# Altium PCB PCB2.PcbDoc (part 1 of 2)
Units mil, origin at the board's own origin, x right, y up, seen from the top; angles counter-clockwise.
Board outline 6550 x 5130 mil, 2 copper layers (Top Layer, Bottom Layer); 91 components, 70 nets, 283 pads, 64 vias.
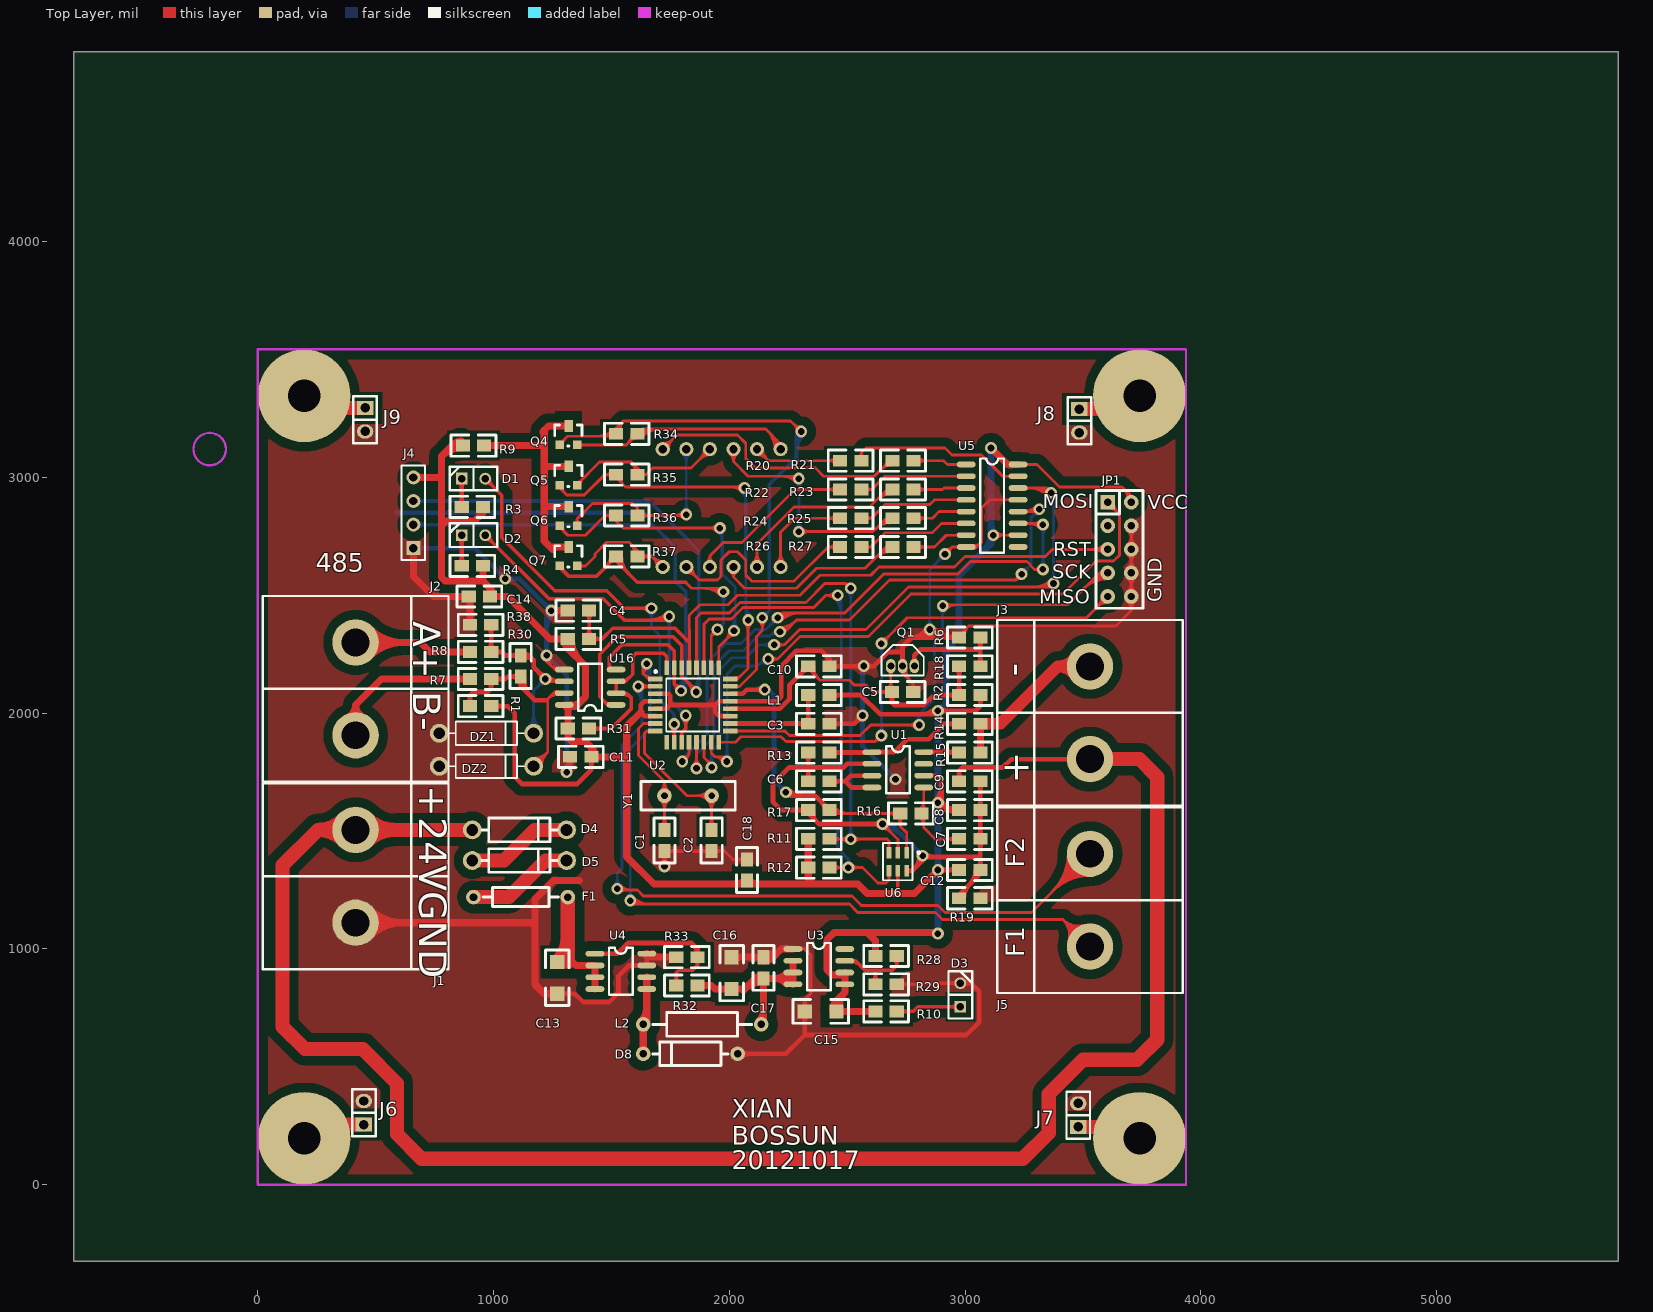
[diagram p0: Top Layer view]
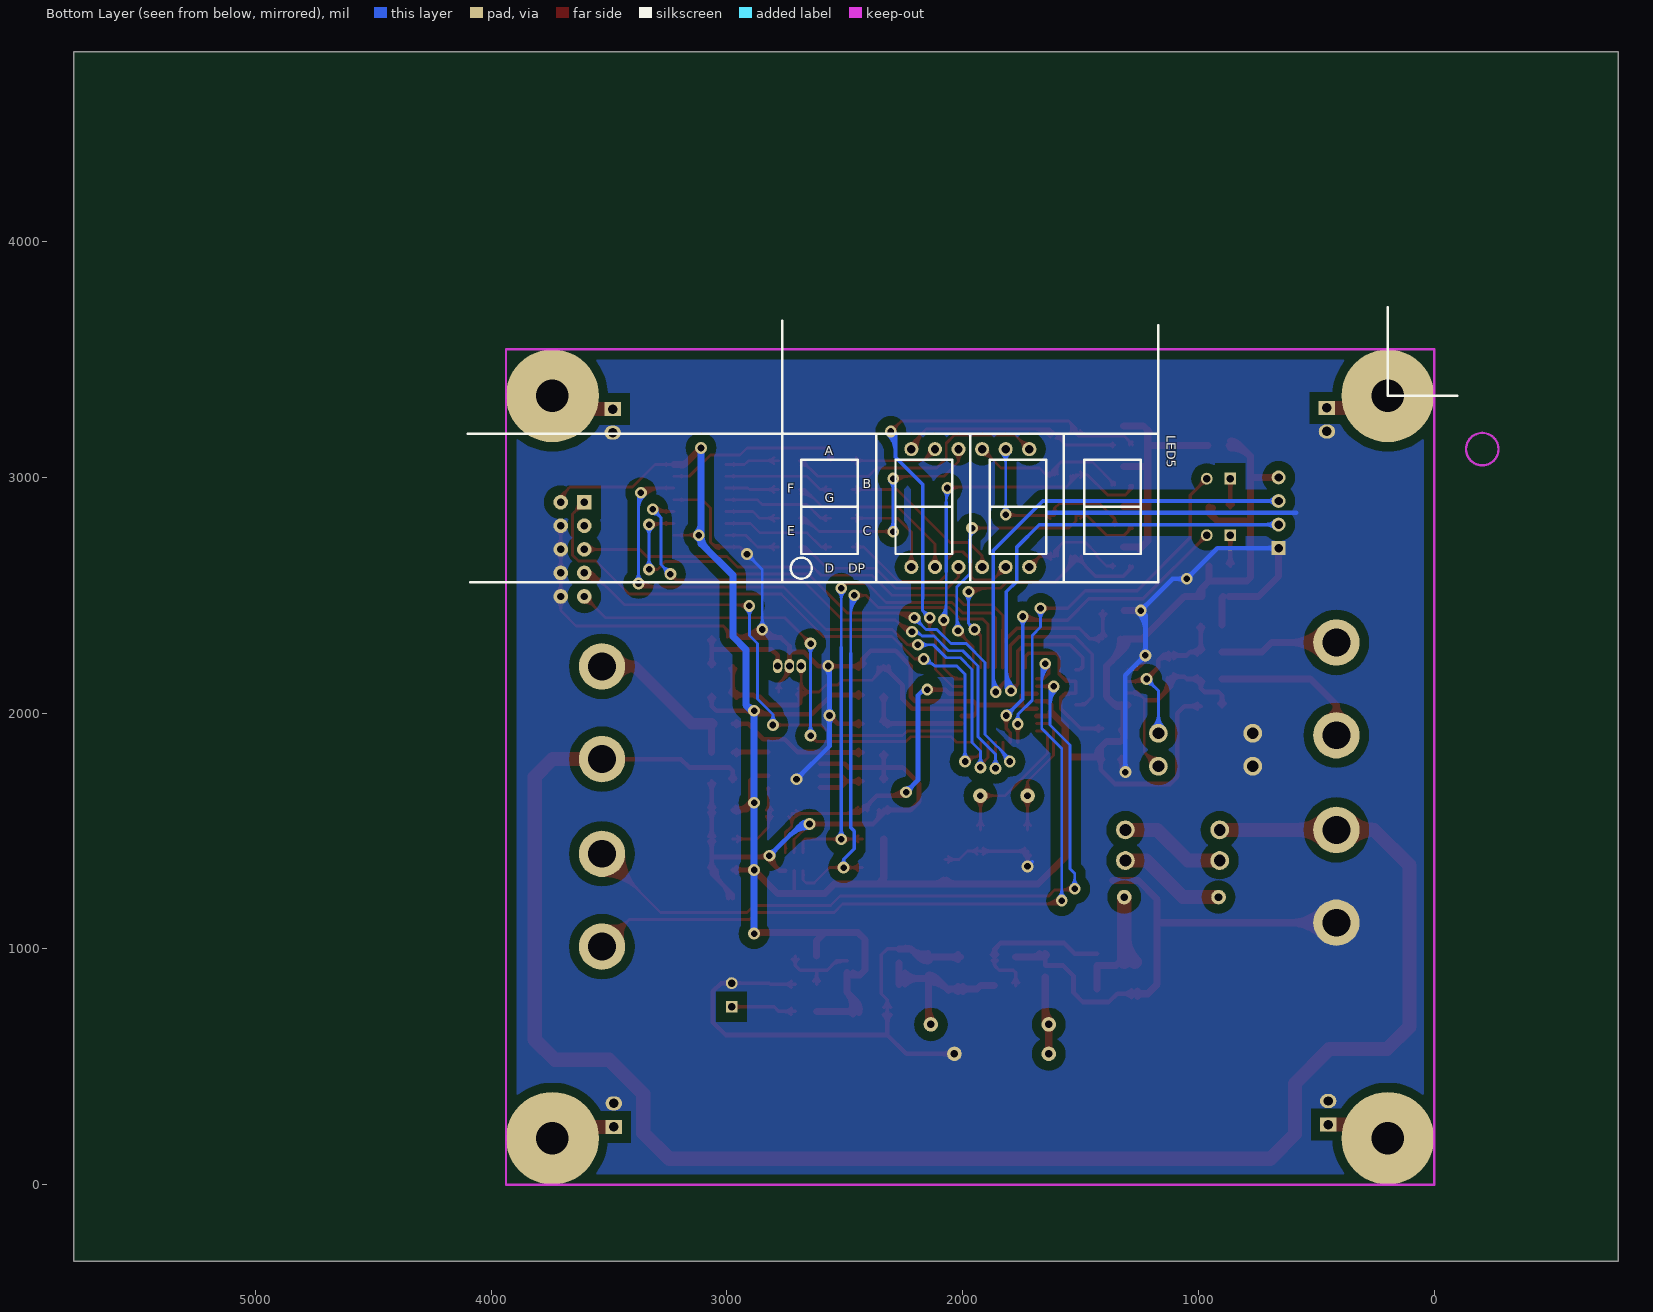
[diagram p1: Bottom Layer view, seen from below]

## Layer stack, top to bottom
Top Layer: signal copper 1.4
Dielectric: dielectric 12.6, FR-4, Dk 4.8
Bottom Layer: signal copper 1.4

## Board outline
-780,4190 -780,-325 5770,-325 5770,4805 -780,4805

## Design rules (kind name [scope] priority, off if disabled: settings)
Clearance poly [(InPolygon)] p1: gap=39.37
Clearance Clearance_2 [All] p2: gap=10
ComponentClearance [All] p1: gap=10 collisioncheckmode=0
HoleSize [All] p1: absolutevalues=TRUE maxlimit=1000 minlimit=1 maxpercent=80.000 minpercent=20.000
PolygonConnect [All] p1: connectstyle=Direct reliefconductorwidth=10 reliefentries=4 polygonreliefangle="90 Angle"
RoutingVias [All] p1: holewidth=28 width=50 viastyle="Through Hole" minholewidth=28 minwidth=50 maxholewidth=28 maxwidth=50
SolderMaskExpansion [All] p1: expansion=4
TestPointUsage [All] p1: valid=0 allowmultiple=FALSE
Testpoint [All] p1: side=15 testpointundercomponent=TRUE minsize=40 maxsize=100 preferedsize=60 minholesize=0 maxholesize=40 preferedholesize=32 testpointgrid=1 style=1023 order=1234567890
Width [All] p1: maxlimit=1000 minlimit=12 preferedwidth=15 toplayer_prefwidth=30 bottomlayer_prefwidth=12 minimp=50.000000 maximp=50.000000 favimp=50.000000
16 further rules are at their usual default settings.

## Components (designator, comment, footprint, x,y, rotation, side; value= is the part's Value field where it differs from the comment)
C1 "15pF" 0805 1725,1415 r90 top
C2 "15pF" 0805 1925,1415 r90 top
C3 "104" 0805 2335,1955 r0 top
C4 "104" 0805 1405,2435 r180 top
C5 "104" 0805 2690,2090 r0 top
C6 "103" 0805 2425,1711 r180 top
C7 "104" 0805 2975,1467 r0 top
C8 "104" 0805 3065,1589 r180 top
C9 "104" 0805 2975,1711 r0 top
C10 "104" 0805 2335,2199 r0 top
C11 "103" 0805 1325,1815 r0 top
C12 "103" 0805 3065,1335 r180 top
C13 "50V/4.7uF" 1206 1270,945 r270 top
C14 "104" 0805 895,2495 r0 top
C15 "16V/4.7uF" 1206 2455,735 r180 top
C16 "16V/4.7uF" 1206 2010,830 r90 top
C17 "104" 0805 2145,965 r270 top
C18 "104" 0805 2075,1380 r270 top
D1 "LED" SIP2 865,2995 r0 top
D2 "LED" SIP2 865,2755 r0 top
D3 "LED" SIP2 2980,755 r90 top
D4 "1N4007" DIODE0.4#1 910,1505 r0 top
D5 "1N4007" DIODE0.4#1 910,1375 r0 top
D8 "5822" DIODE0.4#2 2035,555 r180 top
DZ1 "P6KE10A" DIODE-0.4 970,1915 r0 top
DZ2 "P6KE10A" DIODE-0.4 970,1775 r0 top
F1 "1A" AXIAL0.4 1315,1220 r180 top
J1 "Power" duanzi 415,1505 r270 top
J2 "485" duanzi 415,2300 r270 top
J3 "4-20mA" duanzi 3530,1805 r90 top
J4 "Uart" HDR1X4 660,2700 r90 top
J5 "Power" duanzi 3530,1010 r90 top
J6 "Power" sip2 450,255 r90 top
J7 "Power" sip2 3480,245 r90 top
J8 "Power" sip2 3485,3290 r270 top
J9 "Power" sip2 455,3295 r270 top
JP1 "HEADER 5X2" IDC10 3605,2895 r270 top
L1 "10uH" 0805 2335,2077 r0 top
L2 "22uH" AXIAL0.5 1635,680 r0 top
LED5 "SR*410402" SR410402 2765,2555 r180 bottom
Q1 "431" to-92b 2785,2200 r180 top
Q4 "SI2301" SOT-23 1280,3138 r0 top
Q5 "SI2301" SOT-23 1280,2967 r0 top
Q6 "SI2301" SOT-23 1280,2796 r0 top
Q7 "SI2301" SOT-23 1280,2625 r0 top
R1 "10K" 0805 900,2030 r0 top
R2 "10K" 0805 2975,2077 r0 top
R3 "1K" 0805 865,2875 r0 top
R4 "1K" 0805 865,2625 r0 top
R5 "10K" 0805 1405,2315 r180 top
R6 "1K" 0805 2975,2321 r0 top
R7 "100" 0805 900,2145 r0 top
R8 "100" 0805 900,2260 r0 top
R9 "0" 0805 870,3135 r0 top
R10 "1K" 0805 2710,735 r180 top
R11 "10K" 0805 2425,1467 r180 top
R12 "10K" 0805 2425,1345 r180 top
R13 "51%0.1" 0805 2335,1833 r0 top
R14 "5.1%0.1" 0805 2975,1955 r0 top
R15 "10" 0805 2975,1833 r0 top
R16 "5.1K%0.1" 0805 2725,1575 r0 top
R17 "5.1K%0.1" 0805 2335,1589 r0 top
R18 "0" 0805 2975,2199 r0 top
R19 "0" 0805 3065,1215 r180 top
R20 "200" 0805 2560,3071 r180 top
R21 "200" 0805 2782,3071 r180 top
R22 "200" 0805 2560,2949 r180 top
R23 "200" 0805 2782,2949 r180 top
R24 "200" 0805 2560,2827 r180 top
R25 "200" 0805 2782,2827 r180 top
R26 "200" 0805 2560,2705 r180 top
R27 "200" 0805 2782,2705 r180 top
R28 "36K" 0805 2710,970 r180 top
R29 "27K" 0805 2620,850 r0 top
R30 "4.7K" 0805 1115,2155 r90 top
R31 "10K" 0805 1405,1935 r180 top
R32 "5.1K" 0805 1775,845 r0 top
R33 "1K" 0805 1775,965 r0 top
R34 "0" 0805 1520,3185 r0 top
R35 "0" 0805 1520,3011.67 r0 top
R36 "0" 0805 1520,2838.33 r0 top
R37 "0" 0805 1520,2665 r0 top
R38 "10K" 0805 900,2375 r0 top
U1 "AD8200-YR" so-8 2605,1835 r0 top
U2 "ATmega8-16AC" 32A 1845,2035 r0 top
U3 "NCP3334" SO-8 2270,1000 r0 top
U4 "DB1513" SO-8 1430,980 r0 top
U5 "MC74HC595D" SO-16 3005,3055 r0 top
U6 "ADS1110A0" SO-G6/X.5 2714.57,1370.08 r180 top
U16 "MAX485ESA" SO-8 1520,2035 r180 top
Y1 "8M" XTAL1 1925,1650 r180 top

## Footprints (in the part's own frame and the unit in brackets; to place one, negate y for a bottom-side part, rotate by r counter-clockwise, add the part's x,y. Pads: shape width x height; smd on the part's side, far side on the other; paste and mask are expansions set on the pad)
32A [mm] "QFP; 32 Leads; Body 7 x 7 mm; Pitch 0.8 mm"
  rect 1.55x0.5 smd: 1(-4.025,2.8) 2(-4.025,2) 3(-4.025,1.2) 4(-4.025,0.4) 5(-4.025,-0.4) 6(-4.025,-1.2) 7(-4.025,-2) 8(-4.025,-2.8) 17(4.025,-2.8) 18(4.025,-2) 19(4.025,-1.2) 20(4.025,-0.4) 21(4.025,0.4) 22(4.025,1.2) 23(4.025,2) 24(4.025,2.8)
  rect 0.5x1.55 smd: 9(-2.8,-4.025) 10(-2,-4.025) 11(-1.2,-4.025) 12(-0.4,-4.025) 13(0.4,-4.025) 14(1.2,-4.025) 15(2,-4.025) 16(2.8,-4.025) 25(2.8,4.025) 26(2,4.025) 27(1.2,4.025) 28(0.4,4.025) 29(-0.4,4.025) 30(-1.2,4.025) 31(-2,4.025) 32(-2.8,4.025)
  silkscreen extent -4.12,-2.85 2.85,3.72
0805 [mil]
  rect 60x50 smd: 1(0,0) 2(90,0)
  silkscreen extent -50,-45 140,45
1206 [mil]
  rect 60x60 smd: 1(0,0) 2(135,0)
  silkscreen extent -50,-50 185,50
AXIAL0.4 [mil]
  round 62 hole 32: 1(0,0) 2(400,0)
  silkscreen extent 40,-40 360,40
AXIAL0.5 [mil]
  round 62 hole 32: 1(0,0) 2(500,0)
  silkscreen extent 40,-50 460,50
DIODE0.4#1 [mil]
  round 80 hole 50: 1(0,0) 2(400,0)
  silkscreen extent 40,-50 360,50
DIODE0.4#2 [mil]
  round 62 hole 32: 1(0,0) 2(400,0)
  silkscreen extent 40,-50 360,50
DIODE-0.4 [mil]
  round 80 hole 50: 1(-200,0) 2(200,0)
  silkscreen extent -160,-50 160,50
duanzi [mm]
  round 5 hole 3: 1(0,0) 2(10,0)
  silkscreen extent -5,-10 15,10
HDR1X4 [mm] "Connector; Header; 4 Position"
  rect 1.5x1.5 hole 0.9: 1(0,0)
  round 1.5 hole 0.9: 2(2.54,0) 3(5.08,0) 4(7.62,0)
  silkscreen extent -1.27,-1.27 8.89,1.27
IDC10 [mil]
  rect 62x62 hole 31.5: 1(0,0)
  round 62 hole 31.5: 2(0,100) 3(100,0) 4(100,100) 5(200,0) 6(200,100) 7(300,0) 8(300,100) 9(400,0) 10(400,100)
  silkscreen extent -50,-50 450,150
SIP2 [mil]
  rect 50x50 hole 32: 1(0,0)
  round 50 hole 32: 2(100,0)
  silkscreen extent -50,-50 150,50
sip2 [mil]
  rect 60x70 hole 40: 1(0,0)
  oval 60x70 hole 40: 2(100,0)
  silkscreen extent -50,-50 150,50
so-8 [mil]
  oval 80x24 smd: 1(0,0) 2(0,-50) 3(0,-100) 4(0,-150) 5(220,-150) 6(220,-100) 7(220,-50) 8(220,0)
  silkscreen extent 60,-175 160,25
SO-8 [mil]
  oval 80x24 smd: 1(0,0) 2(0,-50) 3(0,-100) 4(0,-150) 5(220,-150) 6(220,-100) 7(220,-50) 8(220,0)
  silkscreen extent 60,-175 160,25
SO-16 [mil]
  oval 80x24 smd: 1(0,0) 2(0,-50) 3(0,-100) 4(0,-150) 5(0,-200) 6(0,-250) 7(0,-300) 8(0,-350) 9(220,-350) 10(220,-300) 11(220,-250) 12(220,-200) 13(220,-150) 14(220,-100) 15(220,-50) 16(220,0)
  silkscreen extent 60,-375 160,25
SO-G6/X.5 [mm]
  rect 0.5x1.25 smd: 1(-0.95,-0.975) 2(0,-0.975) 3(0.95,-0.975) 4(0.95,0.975) 5(0,0.975) 6(-0.95,0.975)
  silkscreen extent -2.38,-2 1.6,2
SOT-23 [mil]
  rect 36x36 smd: 1(0,0) 2(75,0)
  rect 36x50 smd: 3(38,80)
  silkscreen extent -20,-5 95,85
SR410402 [mm]
  round 1.524 hole 0.9: 1(13.9,1.65) 2(16.44,1.65) 3(18.98,1.65) 4(21.52,1.65) 5(24.06,1.65) 6(26.6,1.65) 7(26.6,14.35) 8(24.06,14.35) 9(21.52,14.35) 10(18.98,14.35) 11(16.44,14.35) 12(13.9,14.35)
  silkscreen extent 0,0 40.5,16
to-92b [mil]
  oval 40x60 hole 30: 1(0,0) 2(50,0) 3(100,0)
  silkscreen extent -40,-90 140,40
XTAL1 [mil]
  round 62 hole 28: 1(0,0) 2(200,0)
  silkscreen extent -100,-60 300,60

## Part data
C1 C2 C3 C4 C5 C6 C7 C8 C9 C10 C12 C17 C18: library part CAP, "Capacitor"
C11 C14: library part Cap, "Capacitor"
C13 C15 C16: library part ELECTRO1, "Electrolytic Capacitor"
D4 D5 D8: library part DIODE, "Diode"
DZ1 DZ2: library part ZENER2, "Zener Diode"
F1: library part "THERMAL FUSE"
J1: library part CON4, "Connector"
J2 J3 J5 J6 J7 J8 J9: library part Buzzer, "Magnetic Transducer Buzzer"
J4: library part "Header 4", "Header, 4-Pin"
L1 R1 R2 R3 R4 R5 R6 R7 R8 R9 R10 R11 R12 R16 R17 R18 R19 R28 R29 R30 R31 R32 R33 R34 R35 R36 R37 R38: library part RES2
L2: library part INDUCTOR1
LED5: library part LED4-8A, "Seven-Segment Display, Right Hand Decimal"
Q1: library part SCR
R13 R14 R15: library part res2
R20 R21 R22 R23 R24 R25 R26 R27: library part R
U1: library part ad8200
U2: "8-Bit AVR Microcontroller with 8K Bytes of In-System Programmable Flash Memory"
U5: library part MC74HC595AN, "8-Bit Serial-Input/Serial or Prallel-Output Shift Register with Latched 3-State Outputs"
U6: library part VOLTREG
U16: library part Pro91A3.TMP_MAX1487E_10
Y1: library part CRYSTAL, "Crystal"

## Free pads (board coordinates)
  round 393.7 hole 137.8: 2(196.85,196.85) 2(196.85,3346.46) 2(3740.16,196.85) 2(3740.16,3346.46)

## Via types
v1: diameter 50, hole 28, Top Layer to Bottom Layer, 64 vias

## Nets (pads, with @x,y where several pads share a name; then routed paths per layer and width w, separated by ;. In a path a pad name is that pad's centre, name@x,y a point inside that pad or via, vN(x,y) a via of type N, cw(c..) or ccw(c..) an arc to the next point about the centre after c; other vN are vias at no path point)
+5: C16.1 C17.2 L2.2 R32.2 U3.2 U3.3 U3.4 | length 1197.5
  Top Layer w30: R32.2@1865,845 1925,845 1940,830 2065,830 2110,875 2270,875 ; C16.1@1999.39,819.39 ccw(c1973.79,793.79) 1973.79,830 ccw(c1973.79,866.21) C16.1@1999.39,840.61 ; C16.1@2020.61,819.39 cw(c2046.21,793.79) 2046.21,830 cw(c2046.21,866.21) C16.1@2020.61,840.61 ; 2059.64,824.64 cw(c2145,739.29) C17.2@2145,860 ; 2092.5,857.5 cw(c2122.64,827.36) C17.2@2140.75,865.95 ; 2110.86,875.86 cw(c2145,841.72) C17.2@2145,890 ; L2.2@2123.69,691.31 ccw(c2072.23,742.77) 2145,742.77 ; L2.2@2135,680 2145,690 C17.2@2145,875 ; U3.4@2244.12,852.12 ccw(c2188.89,796.89) 2188.89,875 ccw(c2188.89,953.11) U3.3@2244.12,897.88 ; U3.4@2270,850 U3.2@2270,940
A3: LED5.11 R20.2 | length 535.6
  Top Layer w12: LED5.11@2117.76,3095.96 cw(c2117.76,3038.02) 2158.73,3078.99 cw(c2199.7,3119.96) LED5.11@2141.76,3119.96 ; LED5.11@2117.76,3119.96 2166.72,3071 R20.2@2470,3071 ; R20.2@2451.56,3057.56 ccw(c2419.13,3025.13) 2419.13,3071 ccw(c2419.13,3116.87) R20.2@2451.56,3084.44
ADC: R16.1 R17.2 U2.22 U6.1 | length 1910.3
  Top Layer w12: R17.2@2425,1589 2439,1575 R16.1@2725,1575 2725,1520 2752.4,1492.6 U6.1@2752.4,1408.39 ; R17.2@2426.46,1585.46 ccw(c2451.73,1610.73) R17.2@2451.73,1575 ; R17.2@2434.95,1593.95 ccw(c2480.7,1639.7) 2480.7,1575 ; R17.2@2443.44,1602.44 ccw(c2509.67,1668.67) 2509.67,1575 ; R16.1@2706.56,1561.56 ccw(c2674.13,1529.13) 2674.13,1575 ccw(c2674.13,1620.87) R16.1@2706.56,1588.44 ; R16.1@2711.56,1561.56 cw(c2679.13,1529.13) 2725,1529.13 cw(c2770.87,1529.13) R16.1@2738.44,1561.56 ; U6.1@2749.25,1425.95 ccw(c2741.65,1433.55) 2752.4,1433.55
  Top Layer w20: U2.22@2003.46,2082.24 2057.24,2082.24 2075,2100 v1(2150,2100) ; v1@2139.39,2089.39 ccw(c2113.79,2063.79) 2113.79,2100 ccw(c2113.79,2136.21) v1@2139.39,2110.61 ; v1@2236.46,1661.46 ccw(c2264.14,1689.14) 2264.14,1650 ; v1(2240,1665) 2245,1665 2260,1650 2364,1650 R17.2@2425,1589 ; v1@2250.61,1675.61 ccw(c2312.43,1737.43) 2312.43,1650 ; 2390.86,1623.14 cw(c2356.72,1589) R17.2@2405,1589 ; R17.2@2402.93,1611.07 ccw(c2420,1628.14) R17.2@2420,1604
  Bottom Layer w20: v1(2150,2100) 2165,2100 2190,2075 2190,1715 v1(2240,1665) ; v1@2225,1665 ccw(c2188.79,1665) 2214.39,1690.61 ccw(c2240,1716.21) v1@2240,1680
AGND: C6.2 C7.2 C8.1 C9.2 C12.1 R13.1 R17.1 R19.2 U1.2 U6.2 U6.6 | length 3754.5
  Top Layer w12: v1@2650,1511 cw(c2650,1465.13) 2682.44,1497.56 cw(c2714.87,1530) v1@2669,1530 ; v1(2650,1530) 2715,1465 U6.2@2715,1408.39 ; U6.2@2711.85,1425.95 ccw(c2704.24,1433.55) 2715,1433.55
  Top Layer w20: R17.1@2319.39,1578.39 ccw(c2293.79,1552.79) 2293.79,1589 ccw(c2293.79,1625.21) R17.1@2319.39,1599.61 ; C6.2@2324.39,1721.61 ccw(c2298.79,1747.21) 2335,1747.21 ccw(c2371.21,1747.21) C6.2@2345.61,1721.61 ; R13.1@2324.39,1822.39 cw(c2298.79,1796.79) 2335,1796.79 cw(c2371.21,1796.79) R13.1@2345.61,1822.39 ; C6.2@2335,1711 2335,1770 ; R13.1@2335,1833 2335,1775 2340,1770 ; R17.1@2354.84,1586.81 ccw(c2409.73,1578.73) 2370.5,1539.5 ; U1.2@2605,1785 2500,1785 2485,1770 2255,1770 2185,1700 2185,1625 2221,1589 R17.1@2335,1589 2335,1575 2380,1530 v1(2650,1530) ; v1@2639.39,1519.39 ccw(c2613.79,1493.79) 2613.79,1530 ccw(c2613.79,1566.21) v1@2639.39,1540.61 ; U6.6@2752.4,1331.61 2776.61,1331.61 2835,1390 3060,1390 3065,1395 ; 2786.62,1341.62 ccw(c2741.25,1386.98) v1@2805.08,1393.48 ; v1@2830.61,1405.61 ccw(c2868.28,1443.28) 2868.28,1390 ; 2985.61,1240.61 ccw(c3011.21,1215) R19.2@2975,1215 2975,1230 3065,1320 C9.2@3065,1711 ; R19.2@2995,1215 cw(c3079.5,1215) 3019.75,1274.75 ; 3020.25,1275.25 ccw(c2960.5,1335) C12.1@3045,1335 ; 3054.39,1309.39 ccw(c3028.79,1335) C12.1@3065,1335 ; C12.1@3054.39,1345.61 ccw(c3028.79,1371.21) 3065,1371.21 ccw(c3101.21,1371.21) C12.1@3075.61,1345.61 ; C7.2@3054.39,1456.39 cw(c3028.79,1430.79) 3065,1430.79 cw(c3101.21,1430.79) C7.2@3075.61,1456.39 ; C7.2@3054.39,1477.61 ccw(c3028.79,1503.21) 3065,1503.21 ccw(c3101.21,1503.21) C7.2@3075.61,1477.61 ; C8.1@3054.39,1578.39 cw(c3028.79,1552.79) 3065,1552.79 cw(c3101.21,1552.79) C8.1@3075.61,1578.39 ; C8.1@3054.39,1599.61 ccw(c3028.79,1625.21) 3065,1625.21 ccw(c3101.21,1625.21) C8.1@3075.61,1599.61 ; C9.2@3054.39,1700.39 cw(c3028.79,1674.79) 3065,1674.79 cw(c3101.21,1674.79) C9.2@3075.61,1700.39
  Bottom Layer w20: v1@2647.31,1534.22 cw(c2663.54,1508.77) 2684.89,1530.11 ; v1@2650,1515 cw(c2650,1394.29) 2735.36,1479.64 ; v1(2650,1530) 2685,1530 ; v1@2650,1535 cw(c2650,1462.57) 2701.21,1513.79 ; v1@2658.07,1517.35 cw(c2677.26,1487.26) 2702.5,1512.5 ; v1@2660.86,1519.66 cw(c2685,1496.67) 2685,1530 ; v1@2660.86,1540.34 ccw(c2685,1563.33) 2685,1530 ; v1@2805,1395 ccw(c2768.79,1395) 2794.39,1420.61 ccw(c2820,1446.21) v1@2820,1410 ; v1(2820,1395) 2685,1530
B3: LED5.7 R21.2 | length 1324.7
  Top Layer w12: LED5.7@1717.76,3119.96 1777.8,3180 2035,3180 2070,3145 2070,3080 2110,3040 2365,3040 2400,3005 2615,3005 2681,3071 R21.2@2692,3071 ; LED5.7@1717.76,3143.96 ccw(c1717.76,3201.9) 1758.73,3160.93 ccw(c1799.7,3119.96) LED5.7@1741.76,3119.96 ; 2644.32,3034.32 cw(c2687,2991.64) R21.2@2687,3052 ; 2658.81,3048.81 ccw(c2636.62,3071) R21.2@2668,3071 ; R21.2@2664.81,3054.81 cw(c2687,3032.62) R21.2@2687,3064
C3: LED5.4 R22.2 | length 854.8
  Top Layer w12: LED5.4@1903.42,2639.21 ccw(c1882.17,2667.75) 1917.76,2667.75 ; LED5.4@1917.76,2619.96 1917.76,2667.76 ; LED5.4@1932.09,2639.21 cw(c1953.34,2667.75) 1917.76,2667.75 ; R22.2@2451.56,2935.56 ccw(c2419.13,2903.13) 2419.13,2949 ccw(c2419.13,2994.87) R22.2@2451.56,2962.44 ; R22.2@2470,2949 2279,2949 2054.04,2724.04 1974.04,2724.04 1917.76,2667.76
D3: LED5.2 R23.2 | length 976.4
  Top Layer w12: LED5.2@2100.79,2636.93 ccw(c2059.81,2677.9) 2117.76,2677.9 ccw(c2175.7,2677.9) LED5.2@2134.73,2636.93 ; LED5.2@2117.76,2619.96 2117.76,2717.76 2275,2875 2595,2875 2669,2949 R23.2@2692,2949 ; 2623.84,2903.84 cw(c2687,2840.67) R23.2@2687,2930 ; 2644.32,2924.32 cw(c2687,2881.64) R23.2@2687,2942
D_1: LED5.12 Q4.2 R34.2 | length 1474.8
  Top Layer w12: Q4.2@1355,3138 1563,3138 1630,3205 2155,3205 2217.76,3142.24 LED5.12@2217.76,3119.96 ccw(c2163.96,3119.96) 2202,3158 ; Q4.2@1363.49,3129.51 cw(c1383.97,3109.03) 1383.97,3138 cw(c1383.97,3166.97) Q4.2@1363.49,3146.49 ; 1569.03,3144.03 ccw(c1528.06,3185) R34.2@1586,3185 ; 1581.1,3156.1 cw(c1605,3132.2) R34.2@1605,3166 ; R34.2@1589.51,3164.51 ccw(c1569.03,3185) R34.2@1598,3185 ; R34.2@1611.46,3188.54 cw(c1651.21,3148.79) 1651.21,3205 ; R34.2@1619.95,3180.05 cw(c1680.18,3119.82) 1680.18,3205 ; R34.2@1628.44,3171.56 cw(c1709.15,3090.85) 1709.15,3205 ; 2161.03,3198.97 cw(c2082.02,3119.96) LED5.12@2193.76,3119.96 ; 2181.51,3178.49 cw(c2122.99,3119.96) LED5.12@2205.76,3119.96
D_2: LED5.9 Q5.2 R35.2 | length 1045.8
  Top Layer w12: Q5.2@1355,2967 1355,2970 1450,3065 1585,3065 1610,3040 ; Q5.2@1355,2979 ccw(c1355,3000.73) 1370.36,2985.36 ; Q5.2@1367,2967 cw(c1403.21,2967) 1377.61,2992.61 ; 1583.37,3066.63 cw(c1543.58,3026.85) R35.2@1598.2,3013.35 ; 1598.4,3051.6 cw(c1567.69,3020.89) R35.2@1609.85,3010.47 ; R35.2@1602.79,3029.24 ccw(c1598.38,3040) 1610,3040 ; R35.2@1613.44,3036.56 cw(c1591.8,3014.93) R35.2@1621.5,3007.59 ; R35.2@1617.21,3029.24 cw(c1621.62,3040) 1610,3040 ; R35.2@1631.77,3002.73 cw(c1646.67,2994.78) 1646.67,3011.67 ; R35.2@1631.77,3020.61 ccw(c1646.67,3028.55) 1646.67,3011.67 ; LED5.9@1893.76,3119.96 cw(c1835.81,3119.96) 1876.79,3078.99 cw(c1917.76,3038.02) LED5.9@1917.76,3095.96 ; LED5.9@1917.76,3142.76 LED5.9@1917.76,3119.96 1837.8,3040 1675,3040 1646.67,3011.67 ; 1610,3040 R35.2@1610,3011.67 1646.67,3011.67
D_3: LED5.8 Q6.2 R36.2 | length 1250.9
  Top Layer w12: Q6.2@1346.51,2804.49 ccw(c1326.03,2824.97) 1355,2824.97 ccw(c1383.97,2824.97) Q6.2@1363.49,2804.49 ; Q6.2@1355,2796 1355,2825 1420,2890 1590,2890 1610,2870 ; R36.2@1601.06,2855.1 ccw(c1593.11,2870) 1610,2870 ; R36.2@1618.94,2855.1 cw(c1626.89,2870) 1610,2870 ; R36.2@1628.44,2824.9 cw(c1660.87,2792.46) 1660.87,2838.33 cw(c1660.87,2884.2) R36.2@1628.44,2851.77 ; 1762.44,2838.33 ccw(c1762.44,2897.56) v1@1804.32,2855.68 ; 1781.33,2838.33 cw(c1781.33,2805.82) v1@1804.32,2828.81 ; 1791.42,2838.33 ccw(c1791.42,2868.58) v1@1812.81,2847.19 ; v1(1817.76,2842.24) 1813.85,2838.33 R36.2@1610,2838.33 1610,2870
  Bottom Layer w12: LED5.8@1800.79,3102.99 cw(c1759.81,3062.02) 1817.76,3062.02 cw(c1875.7,3062.02) LED5.8@1834.73,3102.99 ; v1@1804.32,2855.68 ccw(c1771.89,2888.11) 1817.76,2888.11 ccw(c1863.63,2888.11) v1@1831.19,2855.68 ; v1(1817.76,2842.24) LED5.8@1817.76,3119.96
D_4: LED5.6 Q7.2 R37.2 | length 770.8
  Top Layer w12: Q7.2@1355,2625 1390,2625 1430,2665 1430,2675 1480,2725 1575,2725 1610,2690 R37.2@1610,2665 ; Q7.2@1363.49,2616.51 cw(c1383.97,2596.03) 1383.97,2625 cw(c1383.97,2653.97) Q7.2@1363.49,2633.49 ; 1577.91,2722.09 cw(c1528.47,2672.66) R37.2@1598.03,2665.7 ; 1595.81,2704.19 cw(c1561.02,2669.4) R37.2@1609.98,2664.5
  Top Layer w15: R37.2@1610,2665 1672.72,2665 LED5.6@1717.76,2619.96 ; R37.2@1627.37,2652.63 cw(c1657.25,2622.75) 1657.25,2665 cw(c1657.25,2707.25) R37.2@1627.37,2677.37 ; LED5.6@1695.26,2619.96 ccw(c1640.94,2619.96) 1679.35,2658.37 ccw(c1717.76,2696.78) LED5.6@1717.76,2642.46
DP3: LED5.3 R27.2 | length 1027.2
  Top Layer w12: LED5.3@2005.27,2599.46 cw(c1991.75,2577.25) 2017.76,2577.25 ; LED5.3@2017.76,2619.96 2017.76,2577.24 ; LED5.3@2030.24,2599.46 ccw(c2043.77,2577.25) 2017.76,2577.25 ; 2617.01,2657.01 cw(c2687,2587.02) R27.2@2687,2686 ; 2637.49,2677.49 cw(c2687,2627.99) R27.2@2687,2698 ; 2657.98,2697.98 cw(c2687,2668.96) R27.2@2687,2710 ; R27.2@2692,2705 2665,2705 2575,2615 2370,2615 2285,2530 2065,2530 2017.76,2577.24
DUAN1: Q4.1 R34.1 U2.23 | length 3024
  Top Layer w12: Q4.1@1280,3138 1280,3140 1315,3175 1510,3175 R34.1@1520,3185 1520,3210 1550,3240 ; Q4.1@1280,3150 ccw(c1280,3174.14) 1297.07,3157.07 ; Q4.1@1292,3138 cw(c1325.8,3138) 1301.9,3161.9 ; 1444.99,3175 ccw(c1444.99,3255.01) R34.1@1501.56,3198.43 ; 1473.96,3175 ccw(c1473.96,3226.04) R34.1@1510.05,3189.95 ; R34.1@1520.5,3182.82 cw(c1546.74,3195.52) 1526.13,3216.13 ; R34.1@1531.3,3188.05 cw(c1562.83,3203.3) 1538.06,3228.06 ; R34.1@1542.1,3193.27 cw(c1578.91,3211.08) 1550,3240 ; U2.23@2003.46,2113.74 2043.74,2113.74 2115,2185 2115,2325 2140,2350 v1(2140,2405) ; v1@2126.56,2391.56 cw(c2094.13,2359.13) 2140,2359.13 cw(c2185.87,2359.13) v1@2153.44,2391.56 ; v1@2286,3195 ccw(c2240.13,3195) 2272.56,3227.44 ccw(c2305,3259.87) v1@2305,3214 ; v1(2305,3195) 2260,3240 1550,3240
  Bottom Layer w12: v1(2140,2405) 2170,2435 ; v1@2141.08,2423.97 ccw(c2143.22,2461.77) 2170,2435 ; v1@2158.97,2406.08 cw(c2196.77,2408.22) 2170,2435 ; 2170,2485 2170,2435
  Bottom Layer w15: 2170,2485 2170,2970 2285,3085 2285,3175 ; 2285,3104.47 cw(c2395.53,3104.47) v1@2317.37,3182.63 ; 2285,3140.68 cw(c2359.32,3140.68) v1@2306.77,3193.23 ; 2285,3176.89 cw(c2323.11,3176.89) v1@2296.16,3203.84 ; v1@2288.4,3189.45 cw(c2275.03,3184.97) 2285,3175 ; v1@2299.45,3178.4 ccw(c2294.97,3165.03) 2285,3175 ; v1(2305,3195) 2285,3175
DUAN2: Q5.1 R35.1 U2.24 | length 2353.2
  Top Layer w12: 1286.43,2948.57 cw(c1302.29,2964.44) Q5.1@1280,2967 ; Q5.1@1287,2967 Q5.1@1280,2967 ; Q5.1@1291.92,2965.63 ccw(c1333.82,2960.82) 1304,2931 ; R35.1@1501.02,2998.79 ccw(c1471.67,2971.76) 1471.67,3011.67 ; R35.1@1501.02,3024.54 cw(c1471.67,3051.58) 1471.67,3011.67 ; R35.1@1513.33,3005 R35.1@1520,3011.67 ; R35.1@1531.63,3009.42 ccw(c1556.88,3000.84) 1538.02,2981.98 ; R35.1@1542.99,3005.56 ccw(c1577.25,2993.92) 1551.67,2968.33 ; U2.24@2003.46,2145.24 2035.24,2145.24 2080,2190 v1(2080,2395) ; 2007.06,2960 cw(c2007.06,2897.06) v1@2051.56,2941.56 ; U2.24@2024.13,2149.08 ccw(c2024.13,2185.16) 2049.65,2159.65 ; 2031.2,2960 ccw(c2031.2,2988.8) v1@2051.56,2968.44 ; 2036.03,2960 cw(c2036.03,2926.03) v1@2060.05,2950.05 ; v1(2065,2955) 2060,2960 1560,2960 1520,3000 R35.1@1520,3011.67 ; v1@2066.56,2381.56 cw(c2034.13,2349.13) 2080,2349.13 cw(c2125.87,2349.13) v1@2093.44,2381.56 ; Q5.1@1280,2967 1280,2955 1310,2925 1385,2925 1471.67,3011.67 ; 1471.67,3011.67 R35.1@1520,3011.67
  Bottom Layer w12: v1@2051.56,2941.56 cw(c2007.06,2897.06) 2070,2897.06 ; v1@2060.05,2950.05 cw(c2036.03,2926.03) 2070,2926.03 ; v1(2065,2955) 2070,2950 2070,2895 ; 2070,2436.04 ccw(c2121.04,2436.04) v1@2084.95,2399.95 ; 2070,2465.01 ccw(c2150.01,2465.01) v1@2093.44,2408.44 ; 2070,2600 2070,2405 v1(2080,2395) ; 2070,2921.2 cw(c2098.8,2921.2) v1@2078.44,2941.56
  Bottom Layer w15: 2070,2600 2070,2895
DUAN3: Q6.1 R36.1 U2.25 | length 1874
  Top Layer w12: Q6.1@1280,2784 cw(c1280,2769.51) Q6.1@1290.24,2779.76 ; Q6.1@1280,2796 1281,2796 1281,2789 1315,2755 1390,2755 1473.33,2838.33 ; Q6.1@1292,2796 ccw(c1335.46,2796) 1304.73,2765.27 ; R36.1@1500.65,2825.88 ccw(c1473.34,2802.15) 1473.34,2838.33 ; R36.1@1500.65,2850.79 cw(c1473.34,2874.52) 1473.34,2838.33 ; R36.1@1516.67,2835 R36.1@1520,2838.33 ; v1@1946.56,2771.56 ccw(c1914.13,2739.13) 1914.13,2785 ccw(c1914.13,2830.87) v1@1946.56,2798.44 ; U2.25@1955.24,2193.46 1955.24,2280.24 2025,2350 v1(2020,2350) ; v1(1960,2785) 1550,2785 1520,2815 R36.1@1520,2838.33 ; 1984.03,2309.03 ccw(c1943.06,2350) v1@2001,2350 ; 1996.1,2321.1 cw(c2020,2297.2) v1@2020,2331 ; 2004.51,2329.51 ccw(c1984.03,2350) v1@2013,2350 ; 1473.33,2838.33 R36.1@1520,2838.33
  Bottom Layer w12: v1@1950.29,2768.67 cw(c1929.68,2734.01) 1970,2734.01 ; v1@1956.42,2778.98 cw(c1942.22,2755.11) 1970,2755.11 ; v1(1960,2785) 1970,2775 1970,2735 ; 1970,2640 1970,2590 2025,2535 2025,2355 v1(2020,2350) ; v1@2006.56,2363.44 ccw(c1962.06,2407.94) 2025,2407.94 ; v1@2015.05,2354.95 ccw(c1991.03,2378.97) 2025,2378.97 ; 2025,2383.8 ccw(c2053.8,2383.8) v1@2033.44,2363.44
  Bottom Layer w15: 1970,2640 1970,2735
DUAN4: Q7.1 R37.1 U2.26 | length 1733.3
  Top Layer w12: Q7.1@1280,2620 Q7.1@1280,2625 ; R37.1@1515,2660 R37.1@1520,2665 ; 1815,2555 1840,2530 1960,2530 v1(1975,2515) ; 1892.92,2530 cw(c1892.92,2432.92) v1@1961.56,2501.56 ; 1921.89,2530 cw(c1921.89,2461.89) v1@1970.05,2510.05 ; U2.26@1923.74,2193.46 1923.74,2328.74 ; v1@1931.24,2351.96 cw(c1904.8,2347.69) 1923.74,2328.74 ; v1@1946.96,2336.24 ccw(c1942.69,2309.8) 1923.74,2328.74 ; v1(1950,2355) 1923.74,2328.74 ; 1950.86,2530 cw(c1950.86,2490.86) v1@1978.54,2518.54
  Top Layer w15: Q7.1@1280,2620 1320,2580 1435,2580 R37.1@1520,2665 1520,2645 1610,2555 1815,2555 ; Q7.1@1290.5,2625 ccw(c1327.92,2625) 1301.46,2598.54 ; 1481.59,2626.59 ccw(c1443.18,2665) R37.1@1497.5,2665 ; 1493.66,2638.66 cw(c1515,2617.32) R37.1@1515,2647.5 ; R37.1@1527.5,2665 ccw(c1593.89,2665) 1546.95,2618.05 ; R37.1@1542.5,2665 ccw(c1645.1,2665) 1572.55,2592.45
  Bottom Layer w12: v1(1950,2355) 1975,2380 ; v1@1953.79,2373.62 ccw(c1958.46,2396.54) 1975,2380 ; v1@1961.56,2501.56 cw(c1929.13,2469.13) 1975,2469.13 cw(c2020.87,2469.13) v1@1988.44,2501.56 ; v1@1968.62,2358.79 cw(c1991.54,2363.46) 1975,2380 ; v1(1975,2515) 1975,2380
E3: LED5.1 R24.2 | length 587.6
  Top Layer w12: LED5.1@2200.79,2636.93 ccw(c2159.81,2677.9) 2217.76,2677.9 ccw(c2275.7,2677.9) LED5.1@2234.73,2636.93 ; LED5.1@2217.76,2619.96 2217.76,2767.76 2277,2827 R24.2@2470,2827 ; R24.2@2451.56,2813.56 ccw(c2419.13,2781.13) 2419.13,2827 ccw(c2419.13,2872.87) R24.2@2451.56,2840.44
EN485: R31.1 U2.32 U16.2 U16.3 | length 908.8
  Top Layer w15: R31.1@1405,1935 1500,1935 1585,2020 1585,2065 1565,2085 U16.2@1520,2085 U16.3@1520,2135 1560,2135 1590,2165 1590,2240 1605,2255 1720,2255 1734.76,2240.24 U2.32@1734.76,2193.47 ; R31.1@1422.37,1922.63 cw(c1452.25,1892.75) 1452.25,1935 cw(c1452.25,1977.25) R31.1@1422.37,1947.37 ; U16.2@1548,2080.5 cw(c1548,2028.59) 1584.7,2065.3 ; U16.3@1548,2139.5 ccw(c1548,2179.33) 1576.17,2151.17 ; U16.2@1549.83,2080.89 cw(c1558.47,2061.47) 1573.5,2076.5
F3: LED5.10 R25.2 | length 1556.6
  Top Layer w12: LED5.10@2002,3101.86 cw(c1971.87,3067.25) 2017.76,3067.25 ; LED5.10@2017.76,3119.96 2017.76,3067.24 ; LED5.10@2033.51,3101.86 ccw(c2063.65,3067.25) 2017.76,3067.25 ; 2224.99,3005 cw(c2224.99,2924.99) v1@2281.56,2981.56 ; 2253.96,3005 cw(c2253.96,2953.96) v1@2290.05,2990.05 ; v1(2295,2770) 2610,2770 2667,2827 R25.2@2692,2827 ; v1(2295,2995) 2285,3005 2080,3005 2017.76,3067.24 ; v1@2308.44,2756.56 cw(c2340.87,2724.13) 2340.87,2770 cw(c2340.87,2815.87) v1@2308.44,2783.44 ; 2620.42,2780.42 cw(c2687,2713.85) R25.2@2687,2808 ; 2640.91,2800.91 cw(c2687,2754.82) R25.2@2687,2820 ; 2661.39,2821.39 cw(c2687,2795.79) R25.2@2687,2832
  Bottom Layer w12: v1@2281.56,2783.44 ccw(c2249.13,2815.87) 2295,2815.87 ccw(c2340.87,2815.87) v1@2308.44,2783.44 ; v1@2281.56,2981.56 cw(c2249.13,2949.13) 2295,2949.13 cw(c2340.87,2949.13) v1@2308.44,2981.56 ; v1(2295,2770) v1(2295,2995)
G3: LED5.5 R26.2 | length 1076.6
  Top Layer w12: LED5.5@1817.76,2595.96 cw(c1817.76,2538.02) 1858.73,2578.99 cw(c1899.7,2619.96) LED5.5@1841.76,2619.96 ; LED5.5@1817.76,2619.96 1872.72,2565 1950,2565 1965,2580 1965,2650 2000,2685 2035,2685 2070,2650 2070,2585 2095,2560 2275,2560 2420,2705 ; R26.2@2451.38,2691.75 ccw(c2420,2661.22) 2420,2705 ; R26.2@2451.38,2718.25 cw(c2420,2748.78) 2420,2705 ; R26.2@2470,2705 2420,2705
GND: C1.1 C2.1 C3.2 C4.2 C5.2 C10.2 C11.1 C13.2 C14.1 C15.2 C16.2 C17.1 C18.1 D3.2 D8.1 DZ1.1 DZ2.1 J1.2 J4.1 J6.2 J7.2 J8.2 J9.2 JP1.4 JP1.6 JP1.8 JP1.10 Q1.2 R6.1 R19.1 R29.2 R33.1 R38.1 U2.3 U2.5 U2.19 U2.21 U3.1 U4.7 U4.8 U5.8 U5.13 U16.5 | length 18286.2
  Top Layer w12: v1(1225,2245) 1225,2220 1260,2185 U16.5@1300,2185 ; v1@1231.18,2241.71 ccw(c1255.71,2228.62) 1236.05,2208.95 ; 1241.27,2203.73 ccw(c1272,2234.46) U16.5@1272,2191 ; v1@1241.76,2236.06 ccw(c1270.65,2220.65) 1247.5,2197.5 ; C2.1@1925,1415 1980,1415 2015,1380 C18.1@2075,1380 ; C2.1@1938.44,1401.56 cw(c1970.87,1369.13) 1970.87,1415 cw(c1970.87,1460.87) C2.1@1938.44,1428.44 ; C18.1@2061.56,1366.56 ccw(c2029.13,1334.13) 2029.13,1380 ccw(c2029.13,1425.87) C18.1@2061.56,1393.44 ; 2735,2170 2780,2125 ; Q1.2@2737,2189.91 ccw(c2784.29,2187.66) 2750.81,2154.19 ; Q1.2@2748.98,2189.34 ccw(c2820.92,2185.93) 2770,2135 ; C5.2@2769.65,2105.93 ccw(c2757.27,2125) 2780,2125 ; C5.2@2780,2090 2780,2125 ; C5.2@2790.35,2105.93 cw(c2802.73,2125) 2780,2125 ; v1(2915,2675) 2945,2705 ; v1@2916.08,2693.97 ccw(c2918.22,2731.77) 2945,2705 ; v1@2933.97,2676.08 cw(c2971.77,2678.22) 2945,2705 ; U5.8@2972.76,2700.76 ccw(c2962.51,2690.51) 2962.51,2705 ccw(c2962.51,2719.49) U5.8@2972.76,2709.24 ; R6.1@2975,2321 2975,2330 3015,2370 ; R6.1@2986.95,2321.84 cw(c3023.82,2326.3) 2997.56,2352.56 ; R6.1@2998.86,2323.28 cw(c3054.94,2330.06) 3015,2370 ; U5.8@3032.67,2699.01 ccw(c3034,2723.04) 3051.02,2706.02 ; U5.8@3033.33,2710.99 ccw(c3036,2759) 3070,2725 ; U5.8@3037.24,2700.76 cw(c3047.49,2690.51) 3047.49,2705 cw(c3047.49,2719.49) U5.8@3037.24,2709.24 ; U5.13@3192.76,2900.76 ccw(c3182.51,2890.51) 3182.51,2905 ccw(c3182.51,2919.49) U5.13@3192.76,2909.24 ; U5.13@3225,2905 3105,2905 3070,2870 3070,2725 ; JP1.10@3687.32,2512.68 ccw(c3644.64,2555.36) 3705,2555.36 ccw(c3765.36,2555.36) JP1.10@3722.68,2512.68 ; JP1.8@3687.32,2577.32 cw(c3644.64,2534.64) 3705,2534.64 cw(c3765.36,2534.64) JP1.8@3722.68,2577.32 ; JP1.8@3687.32,2612.68 ccw(c3644.64,2655.36) 3705,2655.36 ccw(c3765.36,2655.36) JP1.8@3722.68,2612.68 ; JP1.6@3687.32,2677.32 cw(c3644.64,2634.64) 3705,2634.64 cw(c3765.36,2634.64) JP1.6@3722.68,2677.32 ; JP1.6@3687.32,2712.68 ccw(c3644.64,2755.36) 3705,2755.36 ccw(c3765.36,2755.36) JP1.6@3722.68,2712.68 ; JP1.4@3687.32,2777.32 cw(c3644.64,2734.64) 3705,2734.64 cw(c3765.36,2734.64) JP1.4@3722.68,2777.32 ; JP1.10@3687.4,2477.25 cw(c3645.51,2435) 3705,2435 ; JP1.10@3695.81,2504.19 ccw(c3673.62,2526.38) 3705,2526.38 ccw(c3736.38,2526.38) JP1.10@3714.19,2504.19 ; JP1.8@3695.81,2585.81 cw(c3673.62,2563.62) 3705,2563.62 cw(c3736.38,2563.62) JP1.8@3714.19,2585.81 ; JP1.8@3695.81,2604.19 ccw(c3673.62,2626.38) 3705,2626.38 ccw(c3736.38,2626.38) JP1.8@3714.19,2604.19 ; JP1.6@3695.81,2685.81 cw(c3673.62,2663.62) 3705,2663.62 cw(c3736.38,2663.62) JP1.6@3714.19,2685.81 ; JP1.6@3695.81,2704.19 ccw(c3673.62,2726.38) 3705,2726.38 ccw(c3736.38,2726.38) JP1.6@3714.19,2704.19 ; JP1.4@3695.81,2785.81 cw(c3673.62,2763.62) 3705,2763.62 cw(c3736.38,2763.62) JP1.4@3714.19,2785.81 ; JP1.10@3695.85,2485.77 cw(c3674.06,2463.8) 3705,2463.8 cw(c3735.94,2463.8) JP1.10@3714.15,2485.77 ; JP1.4@3705,2795 3705,2435 ; JP1.10@3722.6,2477.25 ccw(c3764.49,2435) 3705,2435 ; 2945,2705 3050,2705 3070,2725 ; 3015,2370 3640,2370 3705,2435
  Top Layer w15: U4.7@1650,930 U4.7@1650,940 ; v1@1712.63,1362.37 ccw(c1682.75,1392.25) 1725,1392.25 ccw(c1767.25,1392.25) v1@1737.37,1362.37 ; C1.1@1712.63,1397.63 cw(c1682.75,1367.75) 1725,1367.75 cw(c1767.25,1367.75) C1.1@1737.37,1397.63 ; v1(1725,1350) C1.1@1725,1415 C2.1@1925,1415 ; C1.1@1737.37,1402.63 cw(c1767.25,1372.75) 1767.25,1415 cw(c1767.25,1457.25) C1.1@1737.37,1427.37 ; C2.1@1912.63,1402.63 ccw(c1882.75,1372.75) 1882.75,1415 ccw(c1882.75,1457.25) C2.1@1912.63,1427.37 ; U3.1@2270,1000 2320,1000 2345,975 2345,810 2320,785 ; C15.2@2305.08,751.84 ccw(c2275.7,785) 2320,785 ; C15.2@2320,735 2320,785 ; C15.2@2334.92,751.84 cw(c2364.3,785) 2320,785 ; R29.2@2710,850 2815,850 2820,855 D3.2@2980,855 ; R29.2@2727.37,837.63 cw(c2757.25,807.75) 2757.25,850 cw(c2757.25,892.25) R29.2@2727.37,862.37 ; D3.2@2967.63,842.63 ccw(c2937.75,812.75) 2937.75,855 ccw(c2937.75,897.25) D3.2@2967.63,867.37
  Top Layer w20: C13.2@1270,810 1345,810 1380,775 1490,775 1530,815 1530,885 1575,930 U4.7@1650,930 U4.8@1650,980 ; C13.2@1284.14,795.86 cw(c1318.28,761.72) 1318.28,810 cw(c1318.28,858.28) C13.2@1284.14,824.14 ; v1@1300.27,1761.41 ccw(c1254.59,1815) C11.1@1325,1815 1325,1765 v1(1310,1750) ; v1@1313.24,1746.19 ccw(c1291.53,1771.67) 1325,1771.67 ; C11.1@1314.39,1804.39 cw(c1288.79,1778.79) 1325,1778.79 cw(c1361.21,1778.79) C11.1@1335.61,1804.39 ; U2.5@1686.54,2019.25 1734.25,2019.25 1750,2035 ; U2.3@1686.54,2082.24 1742.76,2082.24 1750,2075 1750,2035 ; U2.19@2003.46,1987.76 1957.24,1987.76 1940,2005 1940,2035 ; D8.1@2035,555 2240,555 2320,635 ; D8.1@2049.85,540.15 cw(c2085.7,504.3) 2085.7,555 cw(c2085.7,605.7) D8.1@2049.85,569.85 ; C15.2@2305.86,720.86 cw(c2271.72,686.72) 2320,686.72 cw(c2368.28,686.72) C15.2@2334.14,720.86 ; C15.2@2320,735 2320,635 ; 2404.63,2250.37 cw(c2355.37,2201.11) C10.2@2425,2198.84 ; C10.2@2415.69,2210.76 ccw(c2400.47,2230) 2425,2230 ; C3.2@2425,1955 2530,1955 v1(2565,1990) ; C10.2@2434.31,2210.76 cw(c2449.53,2230) 2425,2230 ; C3.2@2440.61,1944.39 cw(c2466.21,1918.79) 2466.21,1955 cw(c2466.21,1991.21) C3.2@2440.61,1965.61 ; C10.2@2440.61,2188.39 cw(c2466.21,2162.79) 2466.21,2199 cw(c2466.21,2235.21) C10.2@2440.61,2209.61 ; 2531.37,2199 ccw(c2531.37,2238.63) v1@2559.39,2210.61 ; 2536.2,2199 cw(c2536.2,2166.2) v1@2559.39,2189.39 ; v1@2550,1990 cw(c2513.79,1990) 2539.39,1964.39 cw(c2565,1938.79) v1@2565,1975 ; v1@2580.61,2189.39 cw(c2603.8,2166.2) 2603.8,2199 ; v1@2580.61,2210.61 ccw(c2608.63,2238.63) 2608.63,2199 ; Q1.2@2727.93,2217.07 ccw(c2710.86,2234.14) 2735,2234.14 ccw(c2759.14,2234.14) Q1.2@2742.07,2217.07 ; Q1.2@2735,2200 2735,2285 2771,2321 ; 2735,2260 2673.28,2260 2612.28,2199 C10.2@2425,2199 2425,2230 ; 2803.25,2321 ccw(c2803.25,2378.19) v1@2854.48,2352.78 ; 2832.32,2337.32 ccw(c2871.73,2376.73) 2871.73,2321 ; 2835.49,2321 ccw(c2835.49,2362.2) 2872.4,2343.89 ; v1@2836.56,2361.66 cw(c2771,2394.18) 2771,2321 ; v1@2846.46,2351.46 ccw(c2920.01,2425.01) 2920.01,2321 ; v1@2850,2340 cw(c2850,2303.79) 2875.61,2329.39 cw(c2901.21,2355) v1@2865,2355 ; v1(2850,2355) 2884,2321 ; v1@2860.61,2365.61 ccw(c2968.3,2473.3) R6.1@2968.3,2321 ; R6.1@2959.39,2310.39 ccw(c2933.79,2284.79) 2933.79,2321 ccw(c2933.79,2357.21) R6.1@2959.39,2331.61 ; R6.1@2975,2321 2771,2321 ; D3.2@2980,855 3025,855 3060,820 3060,690 3005,635 2320,635 ; D3.2@2990.61,844.39 cw(c3016.21,818.79) 3016.21,855 cw(c3016.21,891.21) D3.2@2990.61,865.61 ; 1750,2035 1940,2035 ; 1940,2035 1955.75,2050.75 2200.75,2050.75 2220,2070 2220,2200 2285,2265 2390,2265 2425,2230
  Top Layer w30: J1.2@415,1111.3 1173.7,1111.3 1175,1110 ; J1.2@452.78,1073.52 cw(c543.98,982.32) 543.98,1111.3 cw(c543.98,1240.28) J1.2@452.78,1149.08 ; J1.2@473.99,1052.31 cw(c616.41,909.89) 616.41,1111.3 cw(c616.41,1312.71) J1.2@473.99,1170.29 ; J4.1@649.73,2689.73 cw(c624.93,2664.93) 660,2664.93 cw(c695.07,2664.93) J4.1@670.27,2689.73 ; J4.1@660,2700 660,2580 745,2495 C14.1@870,2495 ; C14.1@895,2495 900,2490 R38.1@900,2375 ; v1(1245,2435) C4.2@1315,2435 ; C13.2@1259.39,799.39 ccw(c1233.79,773.79) 1233.79,810 ccw(c1233.79,846.21) C13.2@1259.39,820.61 ; C13.2@1270,810 1215,810 1175,850 1175,1210 1255,1290 1365,1290 ; U4.8@1645.11,977.36 ccw(c1658.5,978.44) 1658.5,965 ; U4.8@1650,980 1665,965 R33.1@1775,965 ; U4.8@1675.01,979.76 ccw(c1691,981.04) 1691,965 ; U4.8@1675.88,977.88 ccw(c1706.97,1008.97) 1706.97,965 ; C16.2@2010,965 C17.1@2145,965 2185,965 2220,1000 ; C16.2@2020.61,954.39 cw(c2046.21,928.79) 2046.21,965 cw(c2046.21,1001.21) C16.2@2020.61,975.61 ; C17.1@2140.23,950.58 ccw(c2150.85,993.83) 2182.34,962.34 ; C17.1@2147.38,979.71 ccw(c2165.68,1054.31) 2220,1000 ; U3.1@2270,1000 2220,1000 ; 2209.56,989.56 cw(c2242,957.13) 2242,1003 ccw(c2242,957.13) 2209.56,989.56
  Bottom Layer w12: v1(1225,2245) v1@1235,2235 ; v1@2836.56,2368.44 ccw(c2804.13,2400.87) 2850,2400.87 ccw(c2895.87,2400.87) v1@2863.44,2368.44 ; v1(2850,2355) 2850,2610 v1(2915,2675) ; v1@2896,2675 cw(c2850.13,2675) 2882.56,2642.56 cw(c2915,2610.13) v1@2915,2656
  Bottom Layer w15: v1@1708.4,1355.55 ccw(c1695.03,1360.03) 1705,1370 ; v1@1719.45,1366.6 cw(c1714.97,1379.97) 1705,1370 ; v1(1725,1350) 1705,1370
  Bottom Layer w20: 585,2850 1638.44,2850 ; J4.1@660,2700 920,2700 v1(1050,2570) 1110,2570 v1(1245,2435) 1225,2415 ; J4.1@673.81,2686.19 cw(c707.14,2652.86) 707.14,2700 cw(c707.14,2747.14) J4.1@673.81,2713.81 ; v1@1035,2570 ccw(c998.79,2570) 1024.39,2595.61 ccw(c1050,2621.21) v1@1050,2585 ; v1@1060.61,2559.39 cw(c1086.21,2533.79) 1086.21,2570 cw(c1086.21,2606.21) v1@1060.61,2580.61 ; v1@1214.39,2255.61 ccw(c1188.79,2281.21) 1225,2281.21 ccw(c1261.21,2281.21) v1@1235.61,2255.61 ; v1@1225,2230 cw(c1225,2193.79) 1250.61,2219.39 cw(c1276.21,2245) v1@1240,2245 ; 1225,2350.5 cw(c1329.5,2350.5) v1@1255.61,2424.39 ; 1225,2398.79 cw(c1281.21,2398.79) v1@1241.46,2438.54 ; v1@1230,2435 ccw(c1193.79,2435) 1219.39,2460.61 ccw(c1245,2486.21) v1@1245,2450 ; v1@1230.27,2432.17 cw(c1211.45,2428.55) 1225,2415 ; v1@1242.17,2420.27 ccw(c1238.55,2401.45) 1225,2415 ; v1@1299.39,1760.61 ccw(c1273.79,1786.21) 1310,1786.21 ccw(c1346.21,1786.21) v1@1320.61,1760.61 ; v1(1310,1750) 1310,2160 v1(1225,2245) 1225,2415 ; v1@2554.39,1979.39 cw(c2528.79,1953.79) 2565,1953.79 cw(c2601.21,1953.79) v1@2575.61,1979.39 ; v1@2554.39,2000.61 ccw(c2528.79,2026.21) 2565,2026.21 ccw(c2601.21,2026.21) v1@2575.61,2000.61 ; 2565,2151.72 cw(c2618.28,2151.72) v1@2580.61,2189.39 ; v1(2570,2200) 2565,2195 2565,1860 v1(2705,1720) ; v1@2690,1720 ccw(c2653.79,1720) 2679.39,1745.61 ccw(c2705,1771.21) v1@2705,1735
IN-: J3.2 R14.2 R15.2 | length 865.4
  Top Layer w30: R15.2@3065,1833 R14.2@3065,1955
  Top Layer w50: R14.2@3065,1955 3150,1955 3393.7,2198.7 ; J3.2@3468.68,2158.31 ccw(c3393.71,2108.92) 3393.71,2198.7 ; J3.2@3468.68,2239.09 cw(c3393.71,2288.48) 3393.71,2198.7 ; J3.2@3530,2198.7 3393.7,2198.7
LCLK: U2.13 U5.12 | length 3130
  Top Layer w12: v1@1847.31,1779.18 ccw(c1814.88,1811.62) 1860.75,1811.62 ccw(c1906.62,1811.62) v1@1874.18,1779.18 ; v1(1860.75,1765.75) U2.13@1860.75,1876.54 ; v1@2215,2340 ccw(c2215,2376.21) 2240.61,2350.61 ; v1(2215,2345) 2235,2345 2285,2395 2510,2395 2680,2565 3215,2565 ; v1@2215,2352 ccw(c2215,2417.18) 2261.09,2371.09 ; v1@2215,2364 ccw(c2215,2458.15) 2281.58,2391.58 ; v1@3221.38,2586.21 cw(c3198.46,2581.54) 3215,2565 ; U5.12@3225,2855 3305,2855 v1(3315,2865) ; v1@3236.21,2571.38 ccw(c3231.54,2548.46) 3215,2565 ; v1(3240,2590) 3215,2565 ; U5.12@3244.99,2855 ccw(c3244.99,2935.01) v1@3301.56,2878.44 ; U5.12@3257.24,2850.76 cw(c3267.49,2840.51) 3267.49,2855 cw(c3267.49,2869.49) U5.12@3257.24,2859.24 ; 3273.96,2855 ccw(c3273.96,2906.04) v1@3310.05,2869.95
  Bottom Layer w12: v1@1847.31,1779.18 ccw(c1814.88,1811.62) 1860.75,1811.62 ccw(c1906.62,1811.62) v1@1874.18,1779.18 ; v1(1860.75,1765.75) 1860.75,1825.75 1935,1900 1935,2200 2000,2265 2060,2265 2121.97,2326.97 2171.97,2326.97 2190,2345 v1(2215,2345) ; 2173.55,2328.55 cw(c2201.34,2300.75) v1@2212.94,2338.31 ; 2187.63,2342.63 cw(c2207.98,2322.27) v1@2216.47,2349.78 ; v1(3240,2590) 3280,2630 3280,2830 v1(3315,2865) ; v1@3240,2609 ccw(c3240,2654.87) 3272.44,2622.44 ccw(c3304.87,2590) v1@3259,2590 ; v1@3296,2865 cw(c3250.13,2865) 3282.56,2832.56 cw(c3315,2800.13) v1@3315,2846
MISO: JP1.9 U2.16 | length 2557.4
  Top Layer w12: U2.16@1955.24,1876.54 2026.54,1876.54 2050,1900 2220,1900 2240,1880 2620,1880 ; v1@2626.38,1901.21 cw(c2603.46,1896.54) 2620,1880 ; v1@2641.21,1886.38 ccw(c2636.54,1863.46) 2620,1880 ; v1(2645,1905) 2620,1880 ; v1(2645,2295) 2755,2405 3515,2405 JP1.9@3605,2495 ; v1@2645,2314 ccw(c2645,2359.87) 2677.44,2327.44 ccw(c2709.87,2295) v1@2664,2295 ; JP1.9@3580,2495 cw(c3519.64,2495) 3562.32,2452.32 cw(c3605,2409.64) JP1.9@3605,2470 ; JP1.9@3592,2495 cw(c3560.62,2495) 3582.81,2472.81 cw(c3605,2450.62) JP1.9@3605,2482
  Bottom Layer w12: v1@2631.56,1918.44 ccw(c2599.13,1950.87) 2645,1950.87 ccw(c2690.87,1950.87) v1@2658.44,1918.44 ; v1@2631.56,2281.56 cw(c2599.13,2249.13) 2645,2249.13 cw(c2690.87,2249.13) v1@2658.44,2281.56 ; v1(2645,1905) v1(2645,2295)